# Altium PCB PCB.PcbDoc
Units mm, origin at the board's own origin, x right, y up, seen from the top; angles counter-clockwise.
Board outline 52.5 x 60 mm, 8 copper layers (Top Side, Inner Layer 1, Inner Layer 2, Inner Layer 3, Inner Layer 4, Inner Layer 5, Inner Layer 6, Bottom Side), stack 0.965 mm thick; 30 components, 92 nets, 265 pads, 118 vias.
Unrouted connection lines stored in the file: 125.
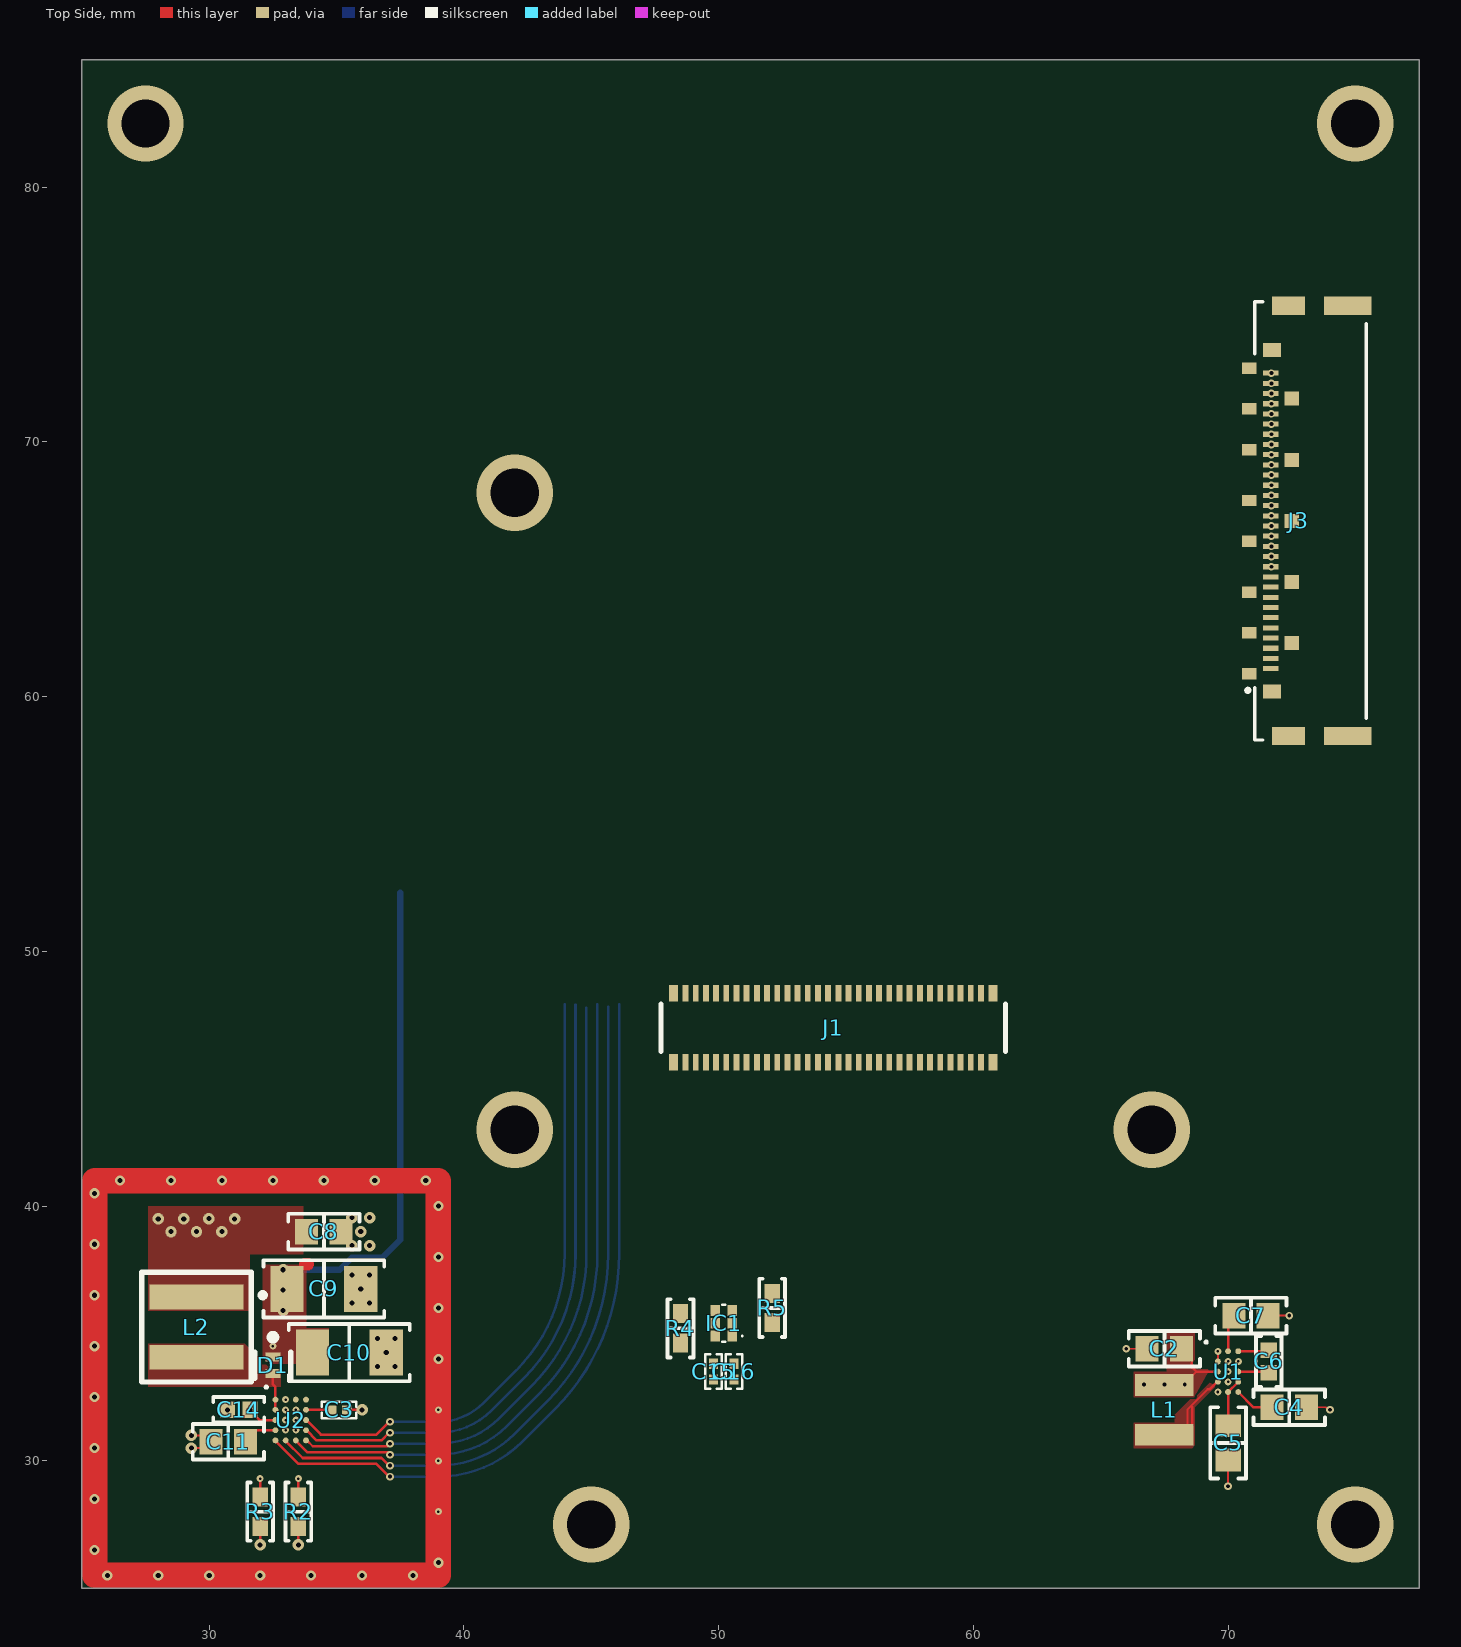
[diagram p0: Top Side view]
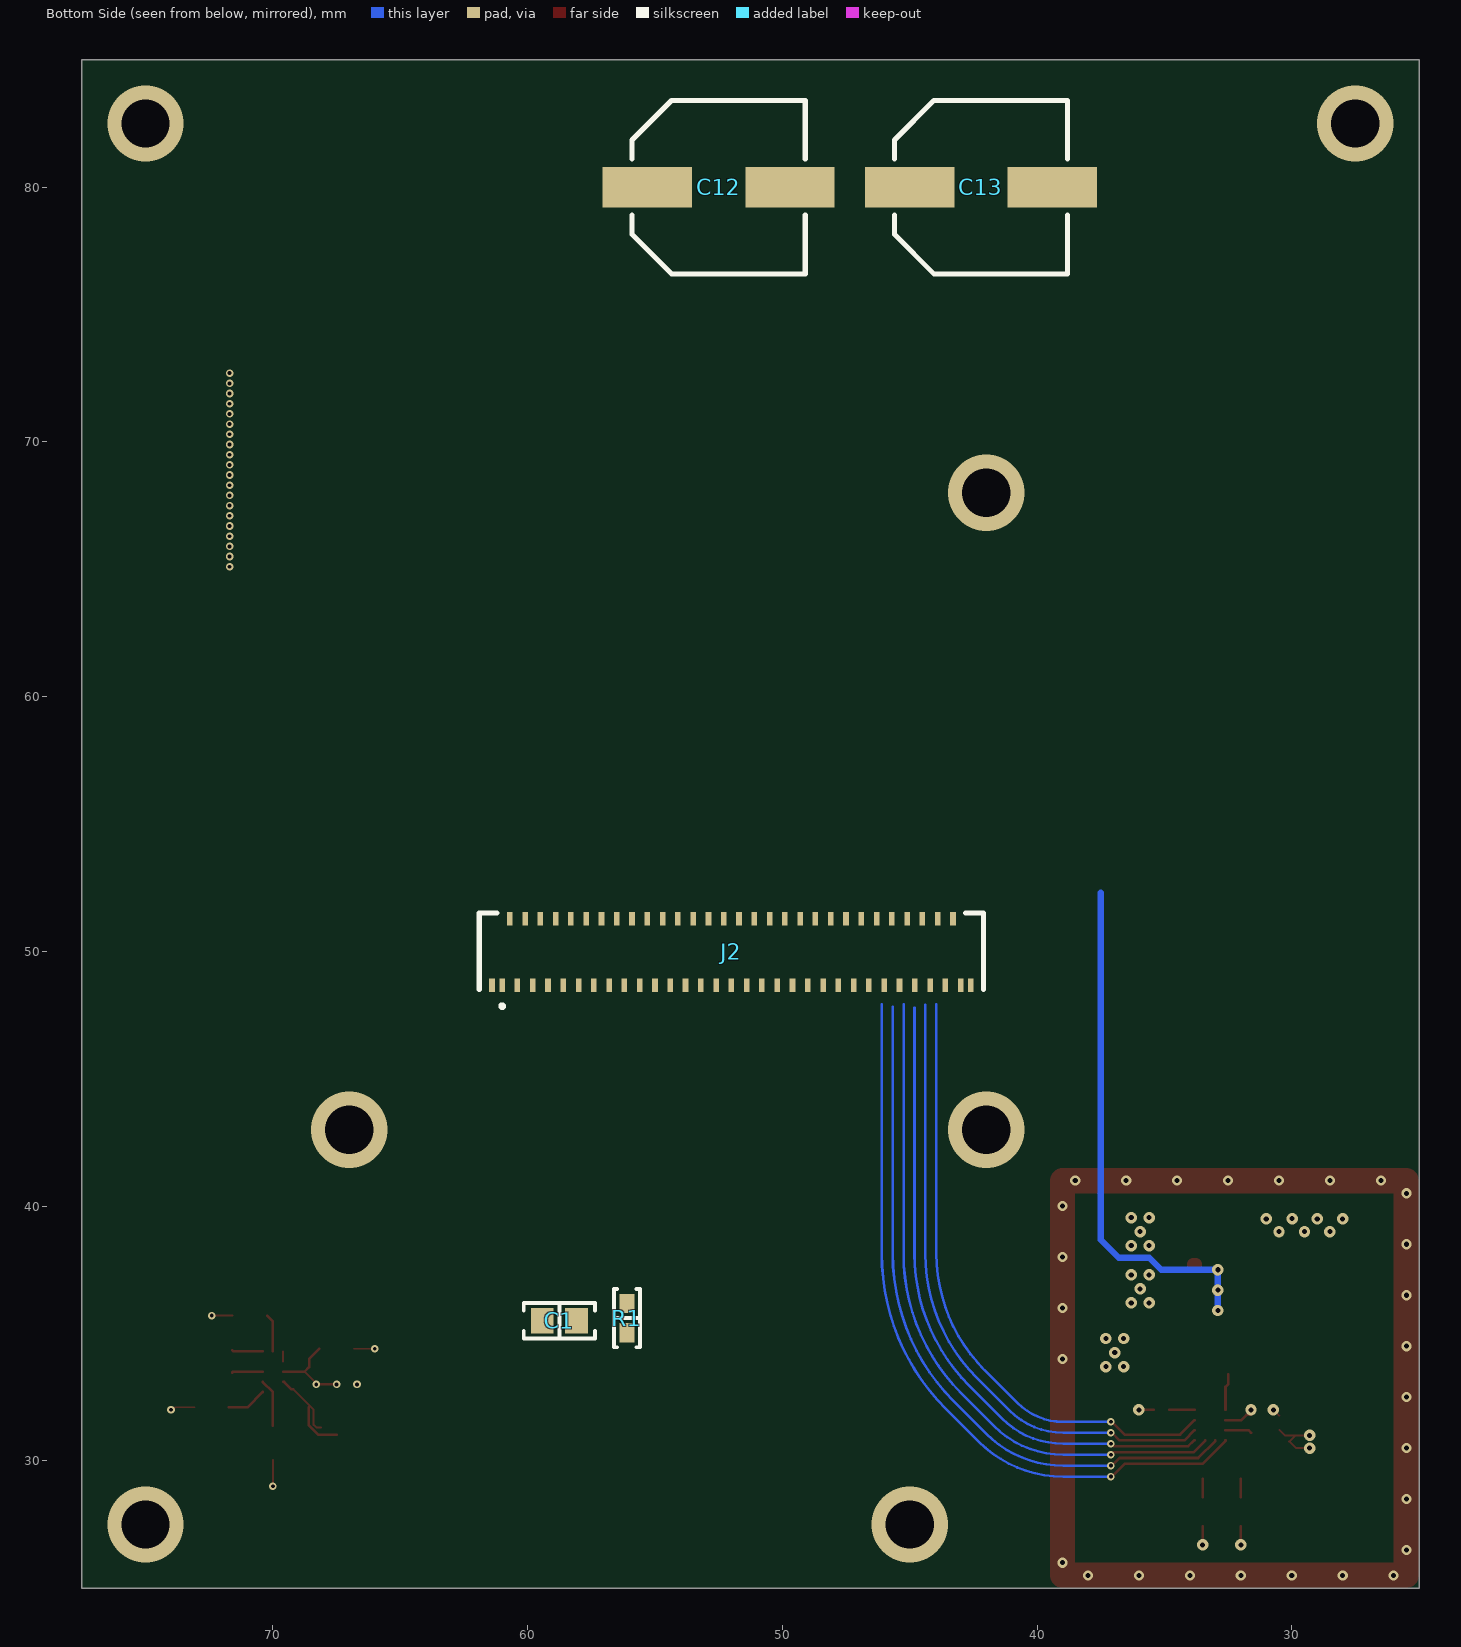
[diagram p1: Bottom Side view, seen from below]
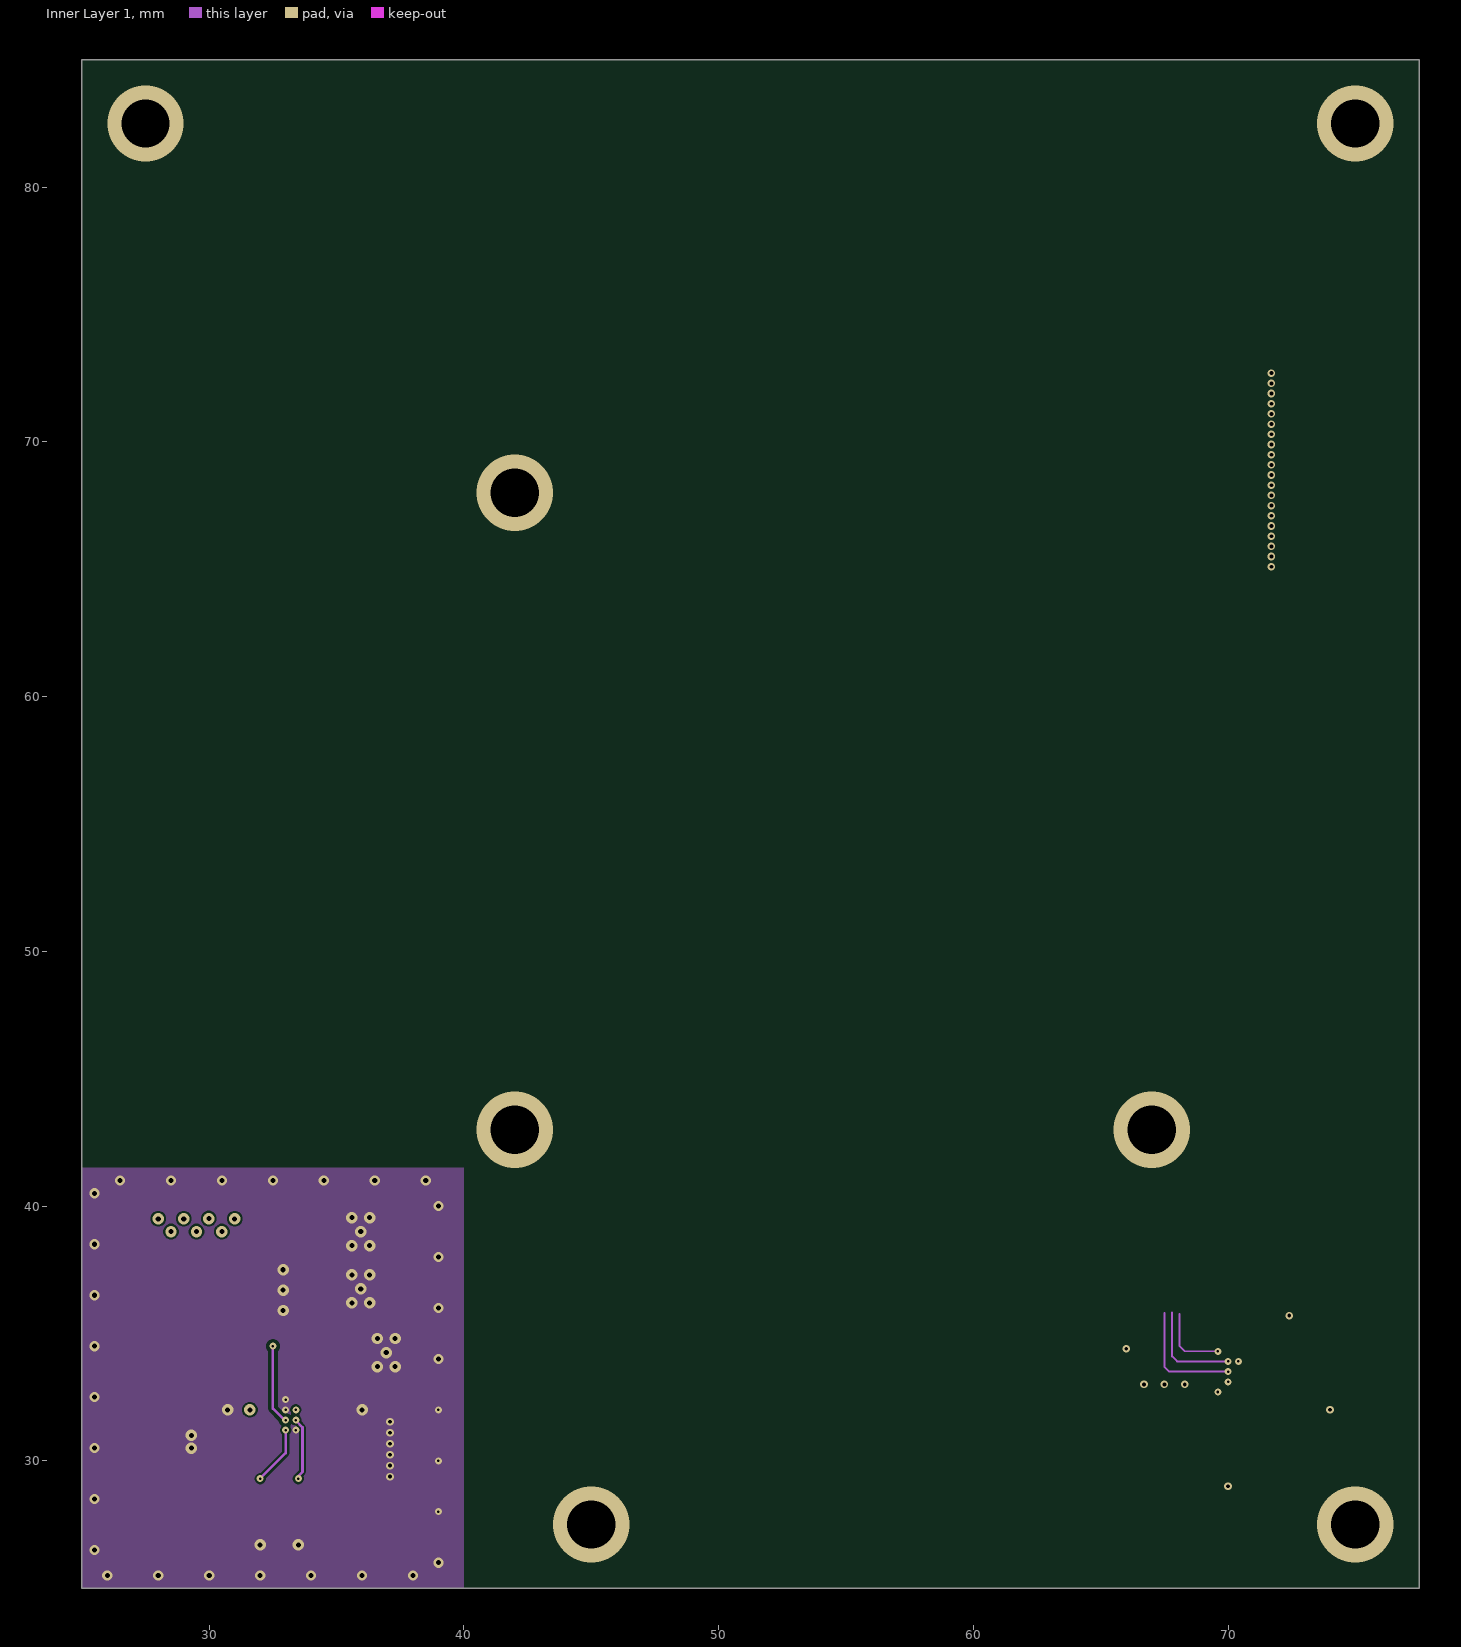
[diagram p2: Inner Layer 1]

## Layer stack, top to bottom
Top Solder: solder mask 0.015, WE-SM-0001, Dk 3.5
Top Side: signal copper 0.03
Dielectric 1: prepreg 0.065, WE-PP-0034, Dk 3.5
Inner Layer 1: signal copper 0.03
Dielectric 2: prepreg 0.125, WE-PP-0035, Dk 3.7
Inner Layer 2: signal copper 0.035
Core 1: core 0.1, WE-CO-0041, Dk 3.8
Inner Layer 3: signal copper 0.035
Dielectric 3: prepreg 0.125, WE-PP-0035, Dk 3.7
Inner Layer 4: signal copper 0.035
Core 2: core 0.1, WE-CO-0041, Dk 3.8
Inner Layer 5: signal copper 0.035
Dielectric 4: prepreg 0.125, WE-PP-0035, Dk 3.7
Inner Layer 6: signal copper 0.03
Dielectric 5: prepreg 0.065, WE-PP-0034, Dk 3.5
Bottom Side: signal copper 0.03
Bottom Solder: solder mask 0.015, WE-SM-0001, Dk 3.5

## Board outline
25,25 77.5,25 77.5,85 25,85

## Design rules (kind name [scope] priority, off if disabled: settings)
Clearance Clearance_1 [InNetClass('HV')] p1: gap=0.13 ignorepadtopadclearanceinfootprint=FALSE
Clearance Clearance_2 [InNetClass('MIPI')] p2: gap=0.075 ignorepadtopadclearanceinfootprint=FALSE except(0.3: Arc-Arc Arc-Track Track-Track)
Clearance [All] p3: gap=0.075 ignorepadtopadclearanceinfootprint=FALSE
DiffPairsRouting [All] p1: maxlimit=0.16 minlimit=0.127 mostfreqgap=0.127 toplayer_mingap=0.16 toplayer_prefgap=0.16 toplayer_minwidth=0.096 toplayer_maxwidth=0.096 toplayer_prefwidth=0.096 midlayer1_maxgap=0.127 midlayer1_minwidth=0.056 midlayer1_maxwidth=0.056 midlayer1_prefwidth=0.056 midlayer2_maxgap=0.127 midlayer2_minwidth=0.056 midlayer2_maxwidth=0.056 midlayer2_prefwidth=0.056 midlayer3_maxgap=0.127 midlayer3_minwidth=0.056 midlayer3_maxwidth=0.056 midlayer3_prefwidth=0.056 midlayer5_maxgap=0.127 midlayer5_minwidth=0.056 midlayer5_maxwidth=0.056 midlayer5_prefwidth=0.056 midlayer6_maxgap=0.127 midlayer6_minwidth=0.051 midlayer6_maxwidth=0.051 midlayer6_prefwidth=0.051 midlayer7_mingap=0.16 midlayer7_prefgap=0.16 midlayer7_minwidth=0.056 midlayer7_maxwidth=0.056 midlayer7_prefwidth=0.056 bottomlayer_mingap=0.16 bottomlayer_prefgap=0.16 bottomlayer_minwidth=0.096 bottomlayer_maxwidth=0.096 bottomlayer_prefwidth=0.096 impedanceprofiledriven=TRUE impedanceprofileid={1041645D-6CA2-4B96-BFB0-DD31A8001BDD} impedanceprofilevalue=100.000000 maxuncoupledlength=12.7
HoleToHoleClearance [All] p1: gap=0.2 allowstackedmicrovias=TRUE
MatchedLengths [InNetClass('MIPI')] p1: tolerance=25.4 checknetsindiffpair=FALSE checkdiffpairvsdiffpair=TRUE checkxsignals=TRUE checkothers=TRUE usedelayunits=TRUE delaytolerance=10.000000 targetsourcename="Not defined"
MinimumSolderMaskSliver [All] p1: minsoldermaskwidth=0.075
ParallelSegment [All] p1: limit=5 gap=0.2
PlaneClearance [All] p1: clearance=0.2
PlaneConnect [All] p1: planeconnectstyle=Direct reliefexpansion=0.508 reliefentries=4 reliefconductorwidth=0.254 reliefairgap=0.254
PolygonConnect [All] p1: connectstyle=Direct reliefconductorwidth=0.254 reliefentries=4 polygonreliefangle="90 Angle" airgapwidth=0.254
RoomDefinition DisplaySupplies [InComponentClass('DisplaySupplies')] p1: confinementstyle=ConfineIn formatcopy=TRUE lockcomponents=FALSE outline 0,0 50.8,0 50.8,25.4 0,25.4
RoomDefinition MainboardConn [InComponentClass('MainboardConn')] p2: confinementstyle=ConfineIn formatcopy=TRUE lockcomponents=FALSE outline 178.943,36.068 190.754,36.068 190.754,62.738 178.943,62.738
RoomDefinition DisplayConn [InComponentClass('DisplayConn')] p3: confinementstyle=ConfineIn formatcopy=TRUE lockcomponents=FALSE outline 178.943,44.831 184.531,44.831 184.531,69.723 178.943,69.723
RoomDefinition CameraConn [InComponentClass('CameraConn')] p4: confinementstyle=ConfineIn formatcopy=TRUE lockcomponents=FALSE outline 178.943,26.797 183.007,26.797 183.007,43.561 178.943,43.561
RoutingVias RoutingVias_1 [IsMicroVia] p1: holewidth=0.1 width=0.3 viastyle="Through Hole" minholewidth=0.1 minwidth=0.22 maxholewidth=0.15 maxwidth=0.35
RoutingVias [All] p2: holewidth=0.2 width=0.5 viastyle="Through Hole" minholewidth=0.15 minwidth=0.3 maxholewidth=5 maxwidth=6
SolderMaskExpansion [All] p1: expansion=0.05 istentingtop=FALSE
Width [All] p1: maxlimit=1 minlimit=0.075 preferedwidth=0.1
24 further rules are at their usual default settings.

## Classes and differential pairs
net class HV: LED1 LED2 LED3 LED4 LED5 LED6 LED+ NetD1_2
differential pair class MIPI: D0_0 D0_1 D0_2 D0_3 D0_C D1_0 D1_1 D1_2 D1_3 D1_C
net class MIPI: D0_0_N D0_0_P D0_1_N D0_1_P D0_2_N D0_2_P D0_3_N D0_3_P D0_C_N D0_C_P D1_0_N D1_0_P D1_1_N D1_1_P D1_2_N D1_2_P D1_3_N D1_3_P D1_C_N D1_C_P
component class MainboardConn: C12 C13 J3
component class DisplaySupplies: C2 C3 C4 C5 C6 C7 C8 C9 C10 C11 C14 C15 C16 D1 IC1 L1 L2 R2 R3 R4 R5 U1 U2
component class DisplayConn: C1 J2 R1
component class CameraConn: J1
differential pair D1_C: +D1_C_P -D1_C_N
differential pair D1_3: +D1_3_P -D1_3_N
differential pair D1_2: +D1_2_P -D1_2_N
differential pair D1_1: +D1_1_P -D1_1_N
differential pair D1_0: +D1_0_P -D1_0_N
differential pair D0_C: +D0_C_P -D0_C_N
differential pair D0_3: +D0_3_P -D0_3_N
differential pair D0_2: +D0_2_P -D0_2_N
differential pair D0_1: +D0_1_P -D0_1_N
differential pair D0_0: +D0_0_P -D0_0_N

## Components (designator, comment, footprint, x,y, rotation, side; value= is the part's Value field where it differs from the comment)
C1 "10 µF" "CAP 0603_1608" 58.75,35.5 r0 bottom
C2 "10 µF" "CAP 0603_1608" 67.5,34.4 r0 top
C3 "0.1 µF" "CAP 0201_0603" 35.1,32 r180 top
C4 "10 µF" "CAP 0603_1608" 72.4,32.1 r180 top
C5 "10 µF" "CAP 0603_1608" 70,30.7 r90 top
C6 "2.2 µF" "CAP 0402_1005" 71.6,33.9 r270 top
C7 "10 µF" "CAP 0603_1608" 70.9,35.7 r180 top
C8 "10 µF" "CAP 0603_1608" 34.5,39 r180 top
C9 "4.7 µF" "CAP 1206_3216 - 0.8MM" 34.5,36.75 r180 top
C10 "4.7 µF" "CAP 1206_3216 - 0.8MM" 35.5,34.25 r180 top
C11 "10 µF" "CAP 0603_1608" 30.75,30.75 r0 top
C12 "220uF" WCAP-PSLP_D6.3H5.8 52.5,80 r0 bottom
C13 "220uF" WCAP-PSLP_D6.3H5.8 42.2,80 r0 bottom
C14 "1 µF" "CAP 0402_1005" 31.16,32 r0 top
C15 "0.1 µF" "CAP 0201_0603" 49.8,33.5 r90 top
C16 "0.1 µF" "CAP 0201_0603" 50.6,33.5 r90 top
D1 "PMEG6010AESBYL" FP-SOD993-MFG 32.5,33.75 r270 top
IC1 "74AXP1T34GMH" PESD3V3L5UF115 50.2,35.4 r90 top
J1 "DF40C-60DP-0.4V_51_" DF40C-60DP-0.4V(51) 54.5,47 r180 top
J2 "504754-6100" 5047546100 52,50 r180 bottom
J3 "20682-030E-02" IPEX_20682-030E-02 71.675,66.9 r90 top
L1 "4.7uH, 0.94A" WE-MAPI_2510 67.5,32 r270 top
L2 "10uH, 2.7A" WE-MAPI_4030 29.5,35.25 r270 top
R1 "2.7k" "RES 0402_1005" 56.1,35.6 r90 bottom
R2 "0 Ohms" "RES 0402_1005" 33.5,28 r270 top
R3 "24.3 kOhms" "RES 0402_1005" 32,28 r270 top
R4 "0 Ohms" "RES 0402_1005" 48.5,35.2 r90 top
R5 "0 Ohms" "RES 0402_1005" 52.1,36 r90 top
U1 "TPS65132AYFFR" BGA15C40P3X5_151X211X62 70,33.5 r0 top
U2 "LP8556TME-E09/NOPB" BGA20C40P4X5_171X237X68 33.2,31.6 r0 top

## Footprints (in the part's own frame and the unit in brackets; to place one, negate y for a bottom-side part, rotate by r counter-clockwise, add the part's x,y. Pads: shape width x height; smd on the part's side, far side on the other; paste and mask are expansions set on the pad)
5047546100 [mm]
  rect 0.22x0.54 smd: 1(-9,-1.33) 3(-8.4,-1.33) 5(-7.8,-1.33) 7(-7.2,-1.33) 9(-6.6,-1.33) 11(-6,-1.33) 13(-5.4,-1.33) 15(-4.8,-1.33) 17(-4.2,-1.33) 19(-3.6,-1.33) 21(-3,-1.33) 23(-2.4,-1.33) 25(-1.8,-1.33) 27(-1.2,-1.33) 29(-0.6,-1.33) 31(0,-1.33) 33(0.6,-1.33) 35(1.2,-1.33) 37(1.8,-1.33) 39(2.4,-1.33) 41(3,-1.33) 43(3.6,-1.33) 45(4.2,-1.33) 47(4.8,-1.33) 49(5.4,-1.33) 51(6,-1.33) 53(6.6,-1.33) 55(7.2,-1.33) 57(7.8,-1.33) 59(8.4,-1.33) 61(9,-1.33) MP1(-9.4,-1.33) MP2(9.4,-1.33)
  rect 0.22x0.53 smd: 2(-8.7,1.285) 4(-8.1,1.285) 6(-7.5,1.285) 8(-6.9,1.285) 10(-6.3,1.285) 12(-5.7,1.285) 14(-5.1,1.285) 16(-4.5,1.285) 18(-3.9,1.285) 20(-3.3,1.285) 22(-2.7,1.285) 24(-2.1,1.285) 26(-1.5,1.285) 28(-0.9,1.285) 30(-0.3,1.285) 32(0.3,1.285) 34(0.9,1.285) 36(1.5,1.285) 38(2.1,1.285) 40(2.7,1.285) 42(3.3,1.285) 44(3.9,1.285) 46(4.5,1.285) 48(5.1,1.285) 50(5.7,1.285) 52(6.3,1.285) 54(6.9,1.285) 56(7.5,1.285) 58(8.1,1.285) 60(8.7,1.285)
  silkscreen extent -9.9,-2.2 9.9,1.5, body extent -9.9,-1.58 9.9,1.53, height 0.9
BGA15C40P3X5_151X211X62 [mm] "BGA, 15-Leads, Body 1.51x2.11mmx0.63mm, Pitch 0.40mm"
  round 0.23 smd mask+0.05: A1(-0.4,0.8) A2(0,0.8) A3(0.4,0.8) B1(-0.4,0.4) B2(0,0.4) B3(0.4,0.4) C1(-0.4,0) C2(0,0) C3(0.4,0) D1(-0.4,-0.4) D2(0,-0.4) D3(0.4,-0.4) E1(-0.4,-0.8) E2(0,-0.8) E3(0.4,-0.8)
  silkscreen extent -0.91,1.11 -0.81,1.21, body extent -0.75,-1.05 0.75,1.06, height 0.63
BGA20C40P4X5_171X237X68 [mm] "BGA, 20-Leads, Body 1.71x2.37mmx0.68mm, Pitch 0.40mm"
  round 0.23 smd mask+0.05: A1(-0.6,0.8) A2(-0.2,0.8) A3(0.2,0.8) A4(0.6,0.8) B1(-0.6,0.4) B2(-0.2,0.4) B3(0.2,0.4) B4(0.6,0.4) C1(-0.6,0) C2(-0.2,0) C3(0.2,0) C4(0.6,0) D1(-0.6,-0.4) D2(-0.2,-0.4) D3(0.2,-0.4) D4(0.6,-0.4) E1(-0.6,-0.8) E2(-0.2,-0.8) E3(0.2,-0.8) E4(0.6,-0.8)
  silkscreen extent -1.01,1.24 -0.91,1.34, body extent -0.85,-1.18 0.85,1.19, height 0.68
"CAP 0201_0603" [mm] "Chip Capacitor, 2-Leads, Body 0.60x0.30mm, IPC Medium Density"
  rect 0.4x0.35 smd: 1(-0.31,0) 2(0.31,0)
  silkscreen extent -0.67,-0.33 0.67,0.33, body extent -0.3,-0.15 0.3,0.15, height 0.3
"CAP 0402_1005" [mm] "Chip Capacitor, 2-Leads, Body 1.02x0.51mm, IPC Medium Density"
  rect 0.6x0.64 smd: 1(-0.44,0) 2(0.44,0)
  silkscreen extent -1,-0.5 1,0.5, body extent -0.5,-0.26 0.5,0.26, height 0.52
"CAP 0603_1608" [mm] "Chip Capacitor, 2-Leads, Body 1.60x0.80mm, IPC Medium Density"
  rect 0.9x1 smd: 1(-0.675,0) 2(0.675,0)
  silkscreen extent -1.4,-0.7 1.4,0.7, body extent -0.8,-0.41 0.8,0.41, height 0.82
"CAP 1206_3216 - 0.8MM" [mm] "Chip Capacitor, 2-Leads, Body 3.25x1.60mm, IPC Medium Density"
  rect 1.3x1.8 smd: 1(-1.45,0) 2(1.45,0)
  silkscreen extent -2.37,-1.12 2.37,1.12, body extent -1.6,-0.8 1.6,0.8, height 0.8
DF40C-60DP-0.4V(51) [mm]
  rect 0.23x0.66 smd: 1(-5.8,-1.355) 2(-5.8,1.355) 3(-5.4,-1.355) 4(-5.4,1.355) 5(-5,-1.355) 6(-5,1.355) 7(-4.6,-1.355) 8(-4.6,1.355) 9(-4.2,-1.355) 10(-4.2,1.355) 11(-3.8,-1.355) 12(-3.8,1.355) 13(-3.4,-1.355) 14(-3.4,1.355) 15(-3,-1.355) 16(-3,1.355) 17(-2.6,-1.355) 18(-2.6,1.355) 19(-2.2,-1.355) 20(-2.2,1.355) 21(-1.8,-1.355) 22(-1.8,1.355) 23(-1.4,-1.355) 24(-1.4,1.355) 25(-1,-1.355) 26(-1,1.355) 27(-0.6,-1.355) 28(-0.6,1.355) 29(-0.2,-1.355) 30(-0.2,1.355) 31(0.2,-1.355) 32(0.2,1.355) 33(0.6,-1.355) 34(0.6,1.355) 35(1,-1.355) 36(1,1.355) 37(1.4,-1.355) 38(1.4,1.355) 39(1.8,-1.355) 40(1.8,1.355) 41(2.2,-1.355) 42(2.2,1.355) 43(2.6,-1.355) 44(2.6,1.355) 45(3,-1.355) 46(3,1.355) 47(3.4,-1.355) 48(3.4,1.355) 49(3.8,-1.355) 50(3.8,1.355) 51(4.2,-1.355) 52(4.2,1.355) 53(4.6,-1.355) 54(4.6,1.355) 55(5,-1.355) 56(5,1.355) 57(5.4,-1.355) 58(5.4,1.355) 59(5.8,-1.355) 60(5.8,1.355)
  rect 0.35x0.66 smd: 61(-6.275,1.355) 62(-6.275,-1.355) 63(6.275,-1.355) 64(6.275,1.355)
  silkscreen extent -6.76,-0.92 6.76,0.92
FP-SOD993-MFG [mm]
  rect 0.35x0.6 smd paste-1000 mask+0: 1(-0.325,0) 2(0.325,0)
  silkscreen extent -1.22,-0.7 0.53,0.7, body extent -0.63,-0.43 0.63,0.43, height 0.25
IPEX_20682-030E-02 [mm]
  rect 0.2x0.6 smd: 1(-5.8,0) 2(-5.4,0) 3(-5,0) 4(-4.6,0) 5(-4.2,0) 6(-3.8,0) 7(-3.4,0) 8(-3,0) 9(-2.6,0) 10(-2.2,0) 11(-1.8,0) 12(-1.4,0) 13(-1,0) 14(-0.6,0) 15(-0.2,0) 16(0.2,0) 17(0.6,0) 18(1,0) 19(1.4,0) 20(1.8,0) 21(2.2,0) 22(2.6,0) 23(3,0) 24(3.4,0) 25(3.8,0) 26(4.2,0) 27(4.6,0) 28(5,0) 29(5.4,0) 30(5.8,0)
  rect 0.71x1.3 smd: S1(-8.445,-0.7) S2(8.445,-0.7)
  rect 0.71x1.85 smd: S3(-8.445,-3.025) S4(8.445,-3.025)
  rect 0.55x0.55 smd: S5(-4.8,-0.825) S6(-2.4,-0.825) S7(0,-0.825) S14(2.4,-0.825) S15(4.8,-0.825)
  rect 0.45x0.58 smd: S8(-6,0.84) S9(-4.4,0.84) S10(-2.8,0.84) S11(-0.8,0.84) S16(0.8,0.84) S17(2.8,0.84) S18(6,0.84) S19(4.4,0.84)
  rect 0.55x0.7 smd: S12(-6.7,-0.05) S13(6.7,-0.05)
  silkscreen extent -8.6,-3.75 8.6,0.97
PESD3V3L5UF115 [mm]
  rect 0.425x0.37 smd: 1(-0.5,-0.337) 2(0,-0.337) 3(0.5,-0.337) 4(0.5,0.337) 5(0,0.337) 6(-0.5,0.337)
  silkscreen extent -0.72,-0.75 0.72,0.05, body extent -0.72,-0.5 0.73,0.5, height 0.47
"RES 0402_1005" [mm] "Chip Resistor, 2-Leads, Body 1.0x0.5mm, IPC Medium Density"
  rect 0.75x0.6 smd: 1(-0.575,0) 2(0.575,0)
  silkscreen extent -1.14,-0.51 1.14,0.51, body extent -0.5,-0.25 0.5,0.25, height 0.35
WCAP-PSLP_D6.3H5.8 [mm] "Aluminum Polymer Capacitors, body diameter 6.3mm"
  rect 3.5x1.6 smd: 1(2.8,0) 2(-2.8,0)
  silkscreen extent -3.4,-3.4 3.4,3.4, body extent -3.65,-3.3 3.65,3.3, height 5.8
WE-MAPI_2510 [mm] "SMT Shielded Power Inductor, body 2..5x2mm"
  rect 0.85x2.3 smd: 1(-0.975,0) 2(0.975,0)
  body extent -1.25,-1 1.25,1, height 1
WE-MAPI_4030 [mm] "SMT Shielded Power Inductor, body 4.1x4.1mm"
  rect 0.98x3.7 smd: 1(-1.185,0) 2(1.185,0)
  silkscreen extent -2.15,-2.15 2.15,2.7, body extent -2.05,-2.05 2.05,2.05, height 3.1

## Part data
C1 C2 C4 C5 C7 C8 C11: library part GRM188R61C106MA73D, "CAP CER 10UF 16V X5R 0603", Device Package="0603 (1608 Metric)", Manufacturer="Murata Electronics", Operating Temperature="-55°C ~ 85°C", Supplier Part Number 1=490-7201-1-ND, Temperature Coefficient=X5R, Tolerance=±20%, Voltage - Rated=16V, Applications="General Purpose", Capacitance="10 µF", ComponentLink1Description=Datasheet, ComponentLink1URL=https://www.murata.com/~/media/webrenewal/support/library/catalog/products/capacitor/mlcc/c02e.ashx?la=en-us, ComponentLink2Description="DigiKey Link", ComponentLink2URL=https://www.digikey.com/en/products/detail/murata-electronics/GRM188R61C106MA73D/3900480, LastUpdated="2022-04-02 05:55:00", Lifecycle Status=Active, Minimum Order=1, Mounting Type="Surface Mount, MLCC", Package / Case="0603 (1608 Metric)", Packaging=TapeAndReel, Part Number=GRM188R61C106MA73D, Part Status=Active, PartId=15141, Price=0.04, Series=GRM, Size / Dimension="0.063\" L x 0.031\" W (1.60mm x 0.80mm)", Supplier 1=DigiKey, Thickness (Max)="0.039\" (1.00mm)"
C3 C15 C16: library part GRM033R61A104KE15D, "CAP CER 0.1UF 10V X5R 0201", Device Package="0201 (0603 Metric)", Manufacturer="Murata Electronics", Operating Temperature="-55°C ~ 85°C", Supplier Part Number 1=490-5881-1-ND, Temperature Coefficient=X5R, Tolerance=±10%, Voltage - Rated=10V, Applications="General Purpose", Capacitance="0.1 µF", ComponentLink1Description=Datasheet, ComponentLink1URL=https://www.murata.com/~/media/webrenewal/support/library/catalog/products/capacitor/mlcc/c02e.ashx?la=en-us, ComponentLink2Description="DigiKey Link", ComponentLink2URL=https://www.digikey.com/en/products/detail/murata-electronics/GRM033R61A104KE15D/2269163, LastUpdated="2022-04-12 22:01:55", Lifecycle Status=Active, Minimum Order=1, Mounting Type="Surface Mount, MLCC", Package / Case="0201 (0603 Metric)", Packaging=CutTape, Part Number=GRM033R61A104KE15D, Part Status=Active, PartId=1641, Price=0.01, Series=GRM, Size / Dimension="0.024\" L x 0.012\" W (0.60mm x 0.30mm)", Supplier 1=DigiKey, Thickness (Max)="0.013\" (0.33mm)"
C6: library part GRM155R61C225ME44D, "CAP CER 2.2UF 16V X5R 0402", Device Package="0402 (1005 Metric)", Manufacturer="Murata Electronics", Operating Temperature="-55°C ~ 85°C", Supplier Part Number 1=490-10456-1-ND, Temperature Coefficient=X5R, Tolerance=±20%, Voltage - Rated=16V, Applications="General Purpose", Capacitance="2.2 µF", ComponentLink1Description=Datasheet, ComponentLink1URL=https://search.murata.co.jp/Ceramy/image/img/A01X/G101/ENG/GRM155R61C225ME44-01.pdf, ComponentLink2Description="DigiKey Link", ComponentLink2URL=https://www.digikey.com/en/products/detail/murata-electronics/GRM155R61C225ME44D/5027541, LastUpdated="2022-04-02 05:51:52", Lifecycle Status=Active, Minimum Order=1, Mounting Type="Surface Mount, MLCC", Package / Case="0402 (1005 Metric)", Packaging=TapeAndReel, Part Number=GRM155R61C225ME44D, Part Status=Active, PartId=4092, Price=0.03, Series=GRM, Size / Dimension="0.039\" L x 0.020\" W (1.00mm x 0.50mm)", Supplier 1=DigiKey, Thickness (Max)="0.024\" (0.60mm)"
C9 C10: library part GRM31CR71H475KA12L, "CAP CER 4.7UF 50V X7R 1206", Device Package="1206 (3216 Metric)", Manufacturer="Murata Electronics", Operating Temperature="-55°C ~ 125°C", Supplier Part Number 1=490-6521-1-ND, Temperature Coefficient=X7R, Tolerance=±10%, Voltage - Rated=50V, Applications="General Purpose", Capacitance="4.7 µF", ComponentLink1Description=Datasheet, ComponentLink1URL=https://www.murata.com/~/media/webrenewal/support/library/catalog/products/capacitor/mlcc/c02e.ashx?la=en-us, ComponentLink2Description="DigiKey Link", ComponentLink2URL=https://www.digikey.com/en/products/detail/murata-electronics/GRM31CR71H475KA12L/2548209, LastUpdated="2022-04-02 06:00:47", Lifecycle Status=Active, Minimum Order=1, Mounting Type="Surface Mount, MLCC", Package / Case="1206 (3216 Metric)", Packaging=TapeAndReel, Part Number=GRM31CR71H475KA12L, Part Status=Active, PartId=20010, Price=0.08, Series=GRM, Size / Dimension="0.126\" L x 0.063\" W (3.20mm x 1.60mm)", Supplier 1=DigiKey, Thickness (Max)="0.071\" (1.80mm)"
C12 C13: library part 875015119006, "WCAP-PHGP Aluminum Polymer Capacitor, H-Chip SMT, L7.3W4.3H1.9mm, 220uF, 6.3V", Capacitance Tolerance=+/-20%, Leakage Current=138.6uA, Manufacturer="Wurth Elektronik", Operating Temperature Max=105°C, Operating Temperature Min=-55°C, Rated Voltage (DC)=6.3V, Ripple Current=5100mA, Capacitance=220uF, Category="Aluminum Polymer Capacitors", ComponentLink1Description="Manufacturer Link", ComponentLink1URL=https://www.we-online.com/redexpert/article/875015119006?ad, ComponentLink2Description=Datasheet, ComponentLink2URL=https://www.we-online.com/redexpert/spec/875015119006?ad, Dissipation Factor=6%, Endurance=2000h, ESR=15mOhm, Height=1.9mm, Length=7.3mm, Manufacturer Part Number=875015119006, Match Code=WCAP-PHGP, Mount="Surface Mount", Packaging="Tape and Reel", Technical Reference=PSE2917221M6R3DHCT2HT19, Width=4.3mm
C14: library part GRM155R61C105MA12D, "CAP CER 1UF 16V X5R 0402", Device Package="0402 (1005 Metric)", Manufacturer="Murata Electronics", Operating Temperature="-55°C ~ 85°C", Supplier Part Number 1=490-14599-1-ND, Temperature Coefficient=X5R, Tolerance=±20%, Voltage - Rated=16V, Applications="General Purpose", Capacitance="1 µF", ComponentLink1Description=Datasheet, ComponentLink1URL=https://search.murata.co.jp/Ceramy/image/img/A01X/G101/ENG/GRM155R61C105MA12-01.pdf, ComponentLink2Description="DigiKey Link", ComponentLink2URL=https://www.digikey.com/en/products/detail/murata-electronics/GRM155R61C105MA12D/4905131, LastUpdated="2022-04-02 05:51:33", Lifecycle Status=Active, Minimum Order=1, Mounting Type="Surface Mount, MLCC", Package / Case="0402 (1005 Metric)", Packaging=TapeAndReel, Part Number=GRM155R61C105MA12D, Part Status=Active, PartId=10295, Price=0.01, Series=GRM, Size / Dimension="0.039\" L x 0.020\" W (1.00mm x 0.50mm)", Supplier 1=DigiKey, Thickness (Max)="0.022\" (0.55mm)"
D1: library part CMP-14398-000012-1, "DIODE SCHOTTKY 60V 1A DSN1006-2"
IC1: "Integrated Circuit", Manufacturer_Name=Nexperia, Mouser Part Number=771-74AXP1T34GMH, Arrow Part Number=74AXP1T34GMH, Arrow Price/Stock=https://www.arrow.com/en/products/74axp1t34gmh/nexperia, Datasheet Link=https://assets.nexperia.com/documents/data-sheet/74AXP1T34.pdf, Height=0.5mm, Manufacturer_Part_Number=74AXP1T34GMH, Mouser Price/Stock=https://www.mouser.co.uk/ProductDetail/Nexperia/74AXP1T34GMH?qs=64Y9EYqwa9hz4MxtKQGkpQ%3D%3D
J1: "Connector", Arrow Part Number=DF40C-60DP-0.4V(51), Manufacturer_Name=Hirose, Mouser Part Number=798-DF40C60DP0.4V51, Arrow Price/Stock=https://www.arrow.com/en/products/df40c-60dp-0.4v-51/hirose-electric?region=nac, Datasheet Link=https://datasheet.datasheetarchive.com/originals/distributors/Datasheets-DGA17/1059795.pdf, Manufacturer_Part_Number=DF40C-60DP-0.4V(51), Mouser Price/Stock=https://www.mouser.co.uk/ProductDetail/Hirose-Connector/DF40C-60DP-04V51?qs=eDUdFcBPps0%252B%252BrqDQtiLyw%3D%3D
J2: "Connector", Manufacturer_Name=Molex, Datasheet Link=https://www.molex.com/pdm_docs/sd/5047546100_sd.pdf, Height=0.8mm, Manufacturer_Part_Number=504754-6100
J3: "Cabline-CAII Rece. Ass'y", Package=None, Availability=Unavailable, MF="{'manufacturer': u'I-PEX'}", MP=20682-030E-02, Price=None
L1: library part 74438323047, "WE-MAPI SMT Power Inductor, size 2510, 4.7uH, 0.94A", DC Resistance max.=388mOhm, DC Resistance typ.=338mOhm, Inductance=4.7uH, Manufacturer="Wurth Elektronik", Operating Temperature="-40 to +125degC", Rated Current=0.94A, Saturation Current=1.75A, Self Resonant Frequency=35MHz, ComponentLink1Description=Manufacturer, ComponentLink1URL=http://www.we-online.de, ComponentLink2Description=Datasheet, ComponentLink2URL=https://www.we-online.com/catalog/datasheet/74438323047.pdf, Height=1mm, Length=2.5mm, Manufacturer Part Number=74438323047, Mounting Technology=SMT, Packaging="Tape and Reel", Size=2510, Width=2mm
L2: library part 74438357100, "WE-MAPI SMT Power Inductor, size 4030, 10uH, 2.7A", DC Resistance max.=110mOhm, DC Resistance typ.=100.8mOhm, Inductance=10uH, Manufacturer="Wurth Elektronik", Operating Temperature="-40 to +125degC", Rated Current=2.7A, Saturation Current=4.6A, Self Resonant Frequency=15MHz, ComponentLink1Description=Manufacturer, ComponentLink1URL=http://www.we-online.de, ComponentLink2Description=Datasheet, ComponentLink2URL=https://www.we-online.com/catalog/datasheet/74438357100.pdf, Height=3.1mm, Length=4.1mm, Manufacturer Part Number=74438357100, Mounting Technology=SMT, Packaging="Tape and Reel", Size=4030, Width=4.1mm
R1: library part RC0402FR-072K7L, "RES 2.7K OHM 1% 1/16W 0402", Device Package="0402 (1005 Metric)", Manufacturer=Yageo, Operating Temperature="-55°C ~ 155°C", Power (Watts)="0.063W, 1/16W", Resistance="2.7 kOhms", Supplier Device Package=0402, Supplier Part Number 1=311-2.70KLRCT-ND, Temperature Coefficient=±100ppm/°C, Tolerance=±1%, ComponentLink1Description=Datasheet, ComponentLink1URL=https://www.yageo.com/upload/media/product/productsearch/datasheet/rchip/PYu-RC_Group_51_RoHS_L_10.pdf, ComponentLink2Description="DigiKey Link", ComponentLink2URL=https://www.digikey.com/en/products/detail/yageo/RC0402FR-072K7L/726556, Composition="Thick Film", Features="Moisture Resistant", Height - Seated (Max)="0.016\" (0.40mm)", LastUpdated="2022-04-02 06:08:11", Lifecycle Status=Active, Minimum Order=1, Number of Terminations=2, Package / Case="0402 (1005 Metric)", Packaging=CutTape, Part Number=RC0402FR-072K7L, Part Status=Active, PartId=2550, Price=0.01, Series=RC_L, Size / Dimension="0.039\" L x 0.020\" W (1.00mm x 0.50mm)", Supplier 1=DigiKey
R2 R4 R5: library part CRCW04020000Z0EDHP, "RES SMD 0 OHM JUMPER 1/5W 0402", Device Package="0402 (1005 Metric)", Manufacturer="Vishay Dale", Operating Temperature="-55°C ~ 155°C", Power (Watts)="0.2W, 1/5W", Ratings=AEC-Q200, Supplier Device Package=0402, Supplier Part Number 1=541-0.0YBCT-ND, Tolerance=Jumper, ComponentLink1Description=Datasheet, ComponentLink1URL=http://www.vishay.com/docs/20043/crcwhpe3.pdf, ComponentLink2Description="DigiKey Link", ComponentLink2URL=http://digikey.com/product-detail/en/vishay-dale/CRCW04020000Z0EDHP/541-0.0YBCT-ND/2223008, Composition="Thick Film", Features="Automotive AEC-Q200, Pulse Withstanding", Height - Seated (Max)="0.016\" (0.40mm)", LastUpdated="2022-04-02 06:08:09", Lifecycle Status=Active, Minimum Order=1, Number of Terminations=2, Package / Case="0402 (1005 Metric)", Packaging=TapeAndReel, Part Number=CRCW04020000Z0EDHP, Part Status=Active, PartId=3131, Price=0.01, Resistance="0 Ohms", Series=CRCW-HP, Size / Dimension="0.039\" L x 0.020\" W (1.00mm x 0.50mm)", Supplier 1=DigiKey
R3: library part RC0402FR-0724K3L, "RES 24.3K OHM 1% 1/16W 0402", Device Package="0402 (1005 Metric)", Manufacturer=Yageo, Operating Temperature="-55°C ~ 155°C", Power (Watts)="0.063W, 1/16W", Supplier Device Package=0402, Supplier Part Number 1=YAG3071CT-ND, Temperature Coefficient=±100ppm/°C, Tolerance=±1%, ComponentLink1Description=Datasheet, ComponentLink1URL=https://www.yageo.com/upload/media/product/productsearch/datasheet/rchip/PYu-RC_Group_51_RoHS_L_10.pdf, ComponentLink2Description="DigiKey Link", ComponentLink2URL=https://www.digikey.com/en/products/detail/yageo/RC0402FR-0724K3L/5280931, Composition="Thick Film", Features="Moisture Resistant", Height - Seated (Max)="0.016\" (0.40mm)", LastUpdated="2022-04-02 06:08:10", Lifecycle Status=Active, Minimum Order=1, Number of Terminations=2, Package / Case="0402 (1005 Metric)", Packaging=CutTape, Part Number=RC0402FR-0724K3L, Part Status=Active, PartId=2738, Price=0.01, Resistance="24.3 kOhms", Series=RC_L, Size / Dimension="0.039\" L x 0.020\" W (1.00mm x 0.50mm)", Supplier 1=DigiKey
U1: library part CMP-019-00049-2, "Split-Rail, Single Inductor Dual Output Converter with Positive and Negative Outputs 15-DSBGA -40 to 85"
U2: library part CMP-019-00051-2, "6 channel high-efficiency/Efficacy LED backlight driver 20-DSBGA -30 to 85"

## Via types
v1: diameter 0.3, hole 0.15, Top Side to Bottom Side, 33 vias
v2: diameter 0.45, hole 0.2, Top Side to Bottom Side, 32 vias
v3: diameter 0.4, hole 0.2, Top Side to Bottom Side, 27 vias
v4: diameter 0.275, hole 0.1, Top Side to Inner Layer 1, 19 vias
v5: diameter 3, hole 1.9, Top Side to Bottom Side, 7 vias

## Nets (pads, with @x,y where several pads share a name; then routed paths per layer and width w, separated by ;. In a path a pad name is that pad's centre, name@x,y a point inside that pad or via, vN(x,y) a via of type N, cw(c..) or ccw(c..) an arc to the next point about the centre after c; other vN are vias at no path point)
+1.1: J1.6 J1.8
+1.8: C1.2 C12.1 C16.2 IC1.1 J1.9 J2.3 J2.4 J2.5 J2.48
+1.8D: J3.2
+2.9: J1.10
+3.3: J1.5 J1.7
+5: C2.2 C8.2 C13.1 C14.2 L1.1 L2.1 U1.C1 U2.C1 | length 4.6
  Top Side w0.075: v1(68.3,33) 68.3,33.05 68.75,33.5
  Top Side w0.1: C14.2@31.6,31.8 31.78,31.8 31.98,31.6 U2.C1 ; v1(67.5,33) v1(68.3,33) ; C2.2 68.575,34 68.575,33.675 68.75,33.5 U1.C1
  other v1: 66.7,33
  other v2: 31.6,32 28.5,39 29.5,39 30.5,39 28,39.5 29,39.5 31,39.5 29.984,39.511
+5D: J3.1
D0_0_N: J2.35 J3.28
  other v1: 71.7,71.9
D0_0_P: J2.36 J3.27
  other v1: 71.7,71.5
D0_1_N: J2.41 J3.24
  other v1: 71.7,70.3
D0_1_P: J2.42 J3.23
  other v1: 71.7,69.9
D0_2_N: J2.44 J3.22
  other v1: 71.7,69.5
D0_2_P: J2.45 J3.21
  other v1: 71.7,69.1
D0_3_N: J2.32 J3.30
  other v1: 71.7,72.7
D0_3_P: J2.33 J3.29
  other v1: 71.7,72.3
D0_C_N: J2.38 J3.26
  other v1: 71.7,71.1
D0_C_P: J2.39 J3.25
  other v1: 71.7,70.7
D0_N: J1.59
D0_P: J1.57
D1_0_N: J2.27 J3.13
  other v1: 71.7,65.9
D1_0_P: J2.26 J3.14
  other v1: 71.7,66.3
D1_1_N: J2.21 J3.17
  other v1: 71.7,67.5
D1_1_P: J2.20 J3.18
  other v1: 71.7,67.9
D1_2_N: J2.18 J3.19
  other v1: 71.7,68.3
D1_2_P: J2.17 J3.20
  other v1: 71.7,68.7
D1_3_N: J2.30 J3.11
  other v1: 71.7,65.1
D1_3_P: J2.29 J3.12
  other v1: 71.7,65.5
D1_C_N: J2.24 J3.15
  other v1: 71.7,66.7
D1_C_P: J2.23 J3.16
  other v1: 71.7,67.1
D1_N: J1.54
D1_P: J1.52
D2_N: J1.53
D2_P: J1.51
D3_N: J1.48
D3_P: J1.46
D4_N: J1.47
D4_P: J1.45
D5_N: J1.42
D5_P: J1.40
D6_N: J1.41
D6_P: J1.39
D7_N: J1.36
D7_P: J1.34
DC_N: J1.60
DC_P: J1.58
EN: C3.2 C15.2 IC1.6 J3.5 U1.A1 U1.B1 U2.B4 | length 4.2
  Top Side w0.075: U1.B1 v4(69.6,34.3)
  Top Side w0.1: U2.B4 C3.2@34.8,32
  Inner Layer 1 w0.075: 68.1,35.763 68.1,34.5 68.3,34.3 v4(69.6,34.3)
GND: C1.1 C2.1 C3.1 C4.1 C5.1 C7.1 C8.1 C9.1 C10.1 C11.1 C12.2 C13.2 C14.1 C15.1 C16.1 IC1.3 J1.11 J1.12 J1.13 J1.14 J1.31 J1.32 J1.37 J1.38 J1.43 J1.44 J1.49 J1.50 J1.55 J1.56 J2.6 J2.9 J2.14 J2.16 J2.19 J2.22 J2.25 J2.28 J2.31 J2.34 J2.37 J2.40 J2.43 J2.46 J2.47 J3.3 J3.4 J3.S1 J3.S2 J3.S3 J3.S4 J3.S5 J3.S6 J3.S7 J3.S8 J3.S9 J3.S10 J3.S11 J3.S12 J3.S13 J3.S14 J3.S15 J3.S16 J3.S17 J3.S18 J3.S19 R1.1 R2.2 R3.2 U1.B3 U1.D2 U1.E1 U2.A2 U2.B2 U2.D3 | length 8.5
  Top Side w0.075: v2(29.3,30.5) 29.825,30.5 C11.1 ; v2(29.3,31) C11.1@29.85,31 ; C11.1@30.1,30.75 C11.1@29.85,31 ; C11.1@30.488,31.213 30.275,31 C11.1@29.85,31 ; C14.1@30.488,31.768 v2(30.72,32) ; v1(66,34.4) C2.1 ; v1(70,29) C5.1 ; C7.1 v1(72.4,35.7) ; C4.1 73.839,32.1 73.939,32 v1(74,32)
  Top Side w0.1: v2(32,26.7) R3.2 ; v2(33.5,26.7) R2.2 ; C3.1 v2(36,32)
  other v2: 36.6,33.7 37.3,33.7 36.95,34.25 36.6,34.8 37.3,34.8 35.6,36.2 36.3,36.2 35.95,36.75 35.6,37.3 36.3,37.3 35.6,38.45 36.3,38.45 35.95,39 35.6,39.55 36.3,39.55
  other v3: 26,25.5 28,25.5 30,25.5 32,25.5 34,25.5 36,25.5 38,25.5 39,26 25.5,26.5 25.5,28.5 25.5,30.5 25.5,32.5 39,34 25.5,34.5 39,36 25.5,36.5 39,38 25.5,38.5 39,40 25.5,40.5 26.5,41 28.5,41 30.5,41 32.5,41 34.5,41 36.5,41 38.5,41
  other v4: 39,28 39,30 33.4,31.2 33,32 39,32 33,32.4 69.6,32.7 70,33.1 70.4,33.9
  other v5: 45,27.5 75,27.5 42,43 67,43 42,68 27.5,82.5 75,82.5
INCK: J1.35
LED1: J2.50 U2.E4 | length 25.2
  Top Side w0.1: U2.E4 33.835,30.8 34.065,30.57 37,30.57 v1(37.1,30.67)
  Bottom Side w0.1: v1(37.1,30.67) 38.978,30.67 ccw(c38.978,34.07) 41.382,31.666 42.664,32.948 ccw(c37.484,38.128) 44.81,38.128 44.81,47.795
LED2: J2.51 U2.D4 | length 24.8
  Top Side w0.1: U2.D4 33.817,31.2 34.217,30.8 36.763,30.8 37.063,31.1 v1(37.1,31.1)
  Bottom Side w0.1: v1(37.1,31.1) 38.978,31.1 ccw(c38.978,34.07) 41.078,31.97 42.36,33.252 ccw(c37.484,38.128) 44.38,38.128 44.38,47.9
LED3: J2.52 U2.C4 | length 24.3
  Top Side w0.1: U2.C4 33.817,31.6 34.387,31.03 36.563,31.03 37.063,31.53 v1(37.1,31.53)
  Bottom Side w0.1: v1(37.1,31.53) 38.978,31.53 ccw(c38.978,34.07) 40.774,32.274 42.056,33.556 ccw(c37.484,38.128) 43.95,38.128 43.95,47.928
LED4: J2.56 U2.E3 | length 26.5
  Top Side w0.1: U2.E3 33.4,30.783 33.843,30.34 37,30.34 v1(37.1,30.24)
  Bottom Side w0.1: v1(37.1,30.24) 38.978,30.24 ccw(c38.978,34.07) 41.686,31.362 42.968,32.644 ccw(c37.484,38.128) 45.24,38.128 45.24,47.928
LED5: J2.57 U2.E2 | length 27.7
  Top Side w0.1: U2.E2 33,30.783 33.673,30.11 36.763,30.11 37.063,29.81 v1(37.1,29.81)
  Bottom Side w0.1: v1(37.1,29.81) 38.978,29.81 ccw(c38.978,34.07) 41.99,31.058 43.272,32.34 ccw(c37.484,38.128) 45.67,38.128 45.67,47.823
LED6: J2.58 U2.E1 | length 29
  Top Side w0.1: U2.E1 32.6,30.783 33.503,29.88 36.563,29.88 37.063,29.38 v1(37.1,29.38)
  Bottom Side w0.1: v1(37.1,29.38) 38.978,29.38 ccw(c38.978,34.07) 42.294,30.754 43.576,32.036 ccw(c37.484,38.128) 46.1,38.128 46.1,47.928
LED+: C9.2 C10.2 D1.1 J2.53 J2.54 J2.55 J2.59 J2.60 J2.61 U2.C2 | length 23.5
  Top Side w0.5: 33.77,37.72 33.857,37.72
  Inner Layer 1 w0.1: v4(32.5,34.5) 32.5,32.051 32.868,31.682 32.87,31.682 32.953,31.6 v4(33,31.6)
  Bottom Side w0.25: v2(32.9,35.9) v2(32.9,36.7) v2(32.9,37.5) 35.121,37.5 35.591,37.97 36.797,37.97 37.5,38.673 37.5,52.3
LEDPWM: J2.10 R5.2
NetC5_2: C5.2 U1.D3 U1.E2 | length 1.9
  Top Side w0.1: C5.2 U1.E2 U1.D3
NetC6_1: C6.1 U1.A3 | length 1.2
  Top Side w0.1: U1.A3 71.56,34.3 C6.1
NetC6_2: C6.2 U1.C3 | length 1.2
  Top Side w0.1: U1.C3 71.56,33.5 C6.2
NetC11_2: C11.2 U2.D1 | length 1
  Top Side w0.1: C11.2@31.6,31.1 31.7,31.2 U2.D1
NetD1_2: D1.2 L2.2 U2.A1 U2.B1 | length 1.4
  Top Side w0.1: D1.2@32.5,33.4 32.5,33 32.6,32.9 U2.B1
NetIC1_2: IC1.2 R5.1
NetL1_2: L1.2 U1.D1 | length 4.5
  Top Side w0.075: L1.2@68.1,31.3 68.288,31.3 68.4,31.413 68.4,32.012 69.194,32.806
  Top Side w0.1: L1.2 68.225,31.025 68.6,31.4 68.6,32.1 ; 69.2,32.8 69.265,32.8 69.565,33.1 U1.D1
NetR2_1: R2.1 U2.C3 | length 3.2
  Top Side w0.1: R2.1 v4(33.5,29.3)
  Inner Layer 1 w0.1: v4(33.4,31.6) 33.4,31.571 33.663,31.309 33.663,29.563 33.5,29.4 v4(33.5,29.3)
NetR3_1: R3.1 U2.D2 | length 3
  Top Side w0.1: R3.1 v4(32,29.3)
  Inner Layer 1 w0.1: v4(32,29.3) 33,30.3 v4(33,31.2)
NetR4_1: R4.1 U2.B3
  other v4: 33.4,32
OMODE: J1.29
PNSLV: J2.13 R1.2
PWM: IC1.4 R4.2
RST: J2.15 J3.10
SCK: J1.16
SCL: J3.6 U1.B2 U2.A3 | length 4
  Inner Layer 1 w0.075: 67.8,35.814 67.8,34.1 68,33.9 v4(70,33.9)
SDA: J3.7 U1.C2 U2.A4 | length 4.7
  Inner Layer 1 w0.075: 67.5,35.8 67.5,33.7 67.7,33.5 v4(70,33.5)
SDI: J1.15
SDO: J1.17
SLAMODE0: J1.20
SLAMODE1: J1.25
SLAMODE2: J1.27
TE1: J2.12 J3.8
TE2: J2.11 J3.9
TOUT0: J1.19
TOUT1: J1.21
TOUT2: J1.23
VSN: C7.2 J2.1 J2.2 U1.A2 | length 1.5
  Top Side w0.1: U1.A2 70,35.475 C7.2
VSP: C4.2 J2.7 J2.8 U1.E3 | length 1.6
  Top Side w0.1: U1.E3 71,32.1 C4.2
XCE: J1.18
XCLR: J1.33
XHS: J1.28
XMASTER: J1.22
XTRIG1: J1.26
XTRIG2: J1.24
XVS: J1.30
pads on no net: IC1.5 J1.1 J1.2 J1.3 J1.4 J1.61 J1.62 J1.63 J1.64 J2.49 J2.MP1 J2.MP2
copper on no net: | length 58
  Top Side w1: 25.5,25.5 39,25.5 39,41 25.5,41 25.5,25.5

## Polygon pours and split planes (outlines as drawn)
+5 on Top Side "+5_L01_P006" (solid, pour order 6): 66.3,32.5 68.673,32.5 69.273,33.6 68.813,33.6 68.575,33.837 68.7,33.962 68.7,35 67.6,35 67.6,33.5 66.3,33.5
NetL1_2 on Top Side "NETL1_2_L01_P007" (solid, pour order 7): 69.5,32.9 68.7,32.1 68.7,30.6 68.6,30.5 66.3,30.5 66.3,31.5 67.9,31.5 67.9,31.8 69.2,33.1 69.4,33
+5 on Top Side "+5_L01_P005" (solid, pour order 5): 27.6,35.9 31.6,35.9 31.6,38.1 33.7,38.1 33.7,38.2 33.6,38.3 33.7,38.4 33.7,40 27.6,40
LED+ on Top Side "LED+_L01_P002" (solid, pour order 2): 32.1,33.8 34.7,33.8 34.7,35.2 33.8,35.2 33.8,37.7 32.1,37.7
NetD1_2 on Top Side "NETD1_2_L01_P001" (solid, remove dead copper, pour order 1): 32.8,32.9 32.8,33.6 32.4,33.6 31.4,34.6 27.6,34.6 27.6,32.9 32.4,32.9
GND on Inner Layer 1 "GND_L02_P003" (solid, pour order 3): 25,41.5 40,41.5 40,25 25,25

## Silkscreen, mask and mechanical layers (free items; w line width, h text height)
Top Solder:
  lines w1: 25.5,25.5 39,25.5 39,41 25.5,41 25.5,25.5
Board Shape:
  the board outline again, w0.1
Mechanical 13:
  lines w0.254: 42,43 67,43 67,68 42,68 42,43

## Dimensions
42,43 to 42,68 on Mechanical 13
42,68 to 67,68 on Mechanical 13